# Altium PCB Driver3.0.PcbDoc
Units mm, origin at the board's own origin, x right, y up, seen from the top; angles counter-clockwise.
Board outline 90 x 60 mm, 2 copper layers (Top Layer, Bottom Layer); 33 components, 24 nets, 97 pads, 0 vias.
Unrouted connection lines stored in the file: 66.
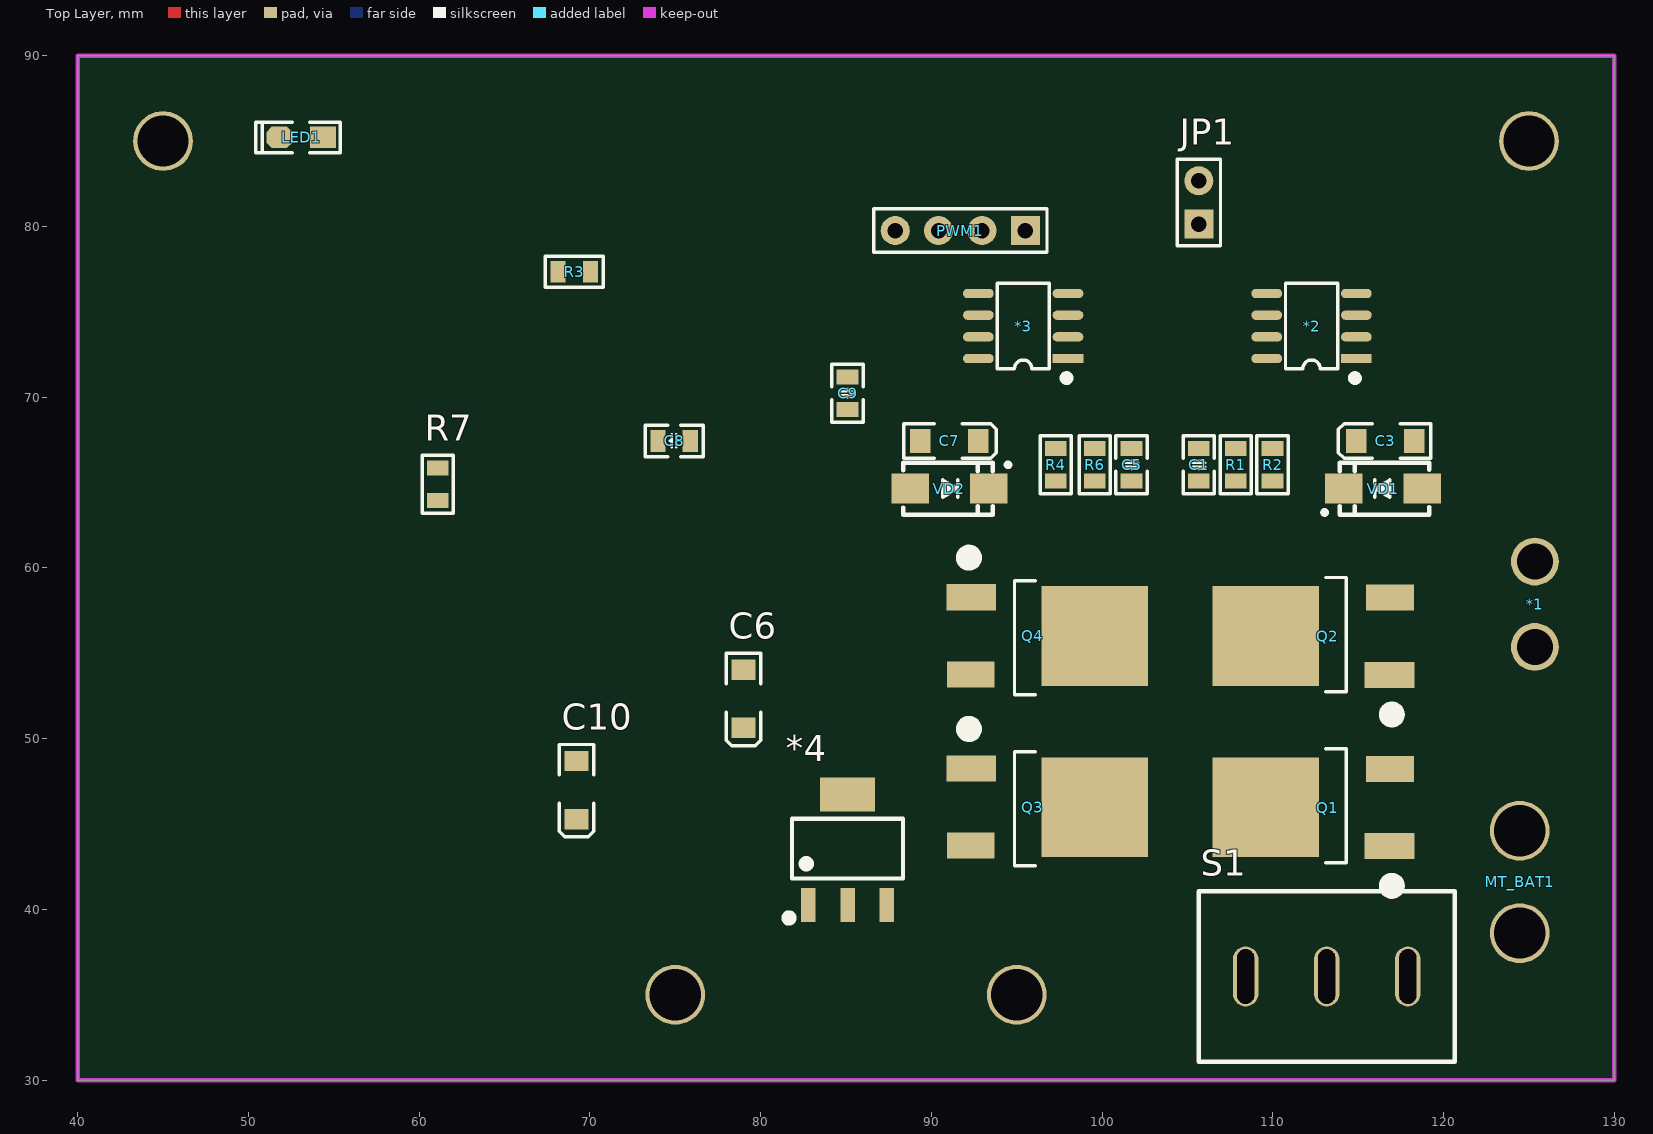
[diagram p0: Top Layer view]
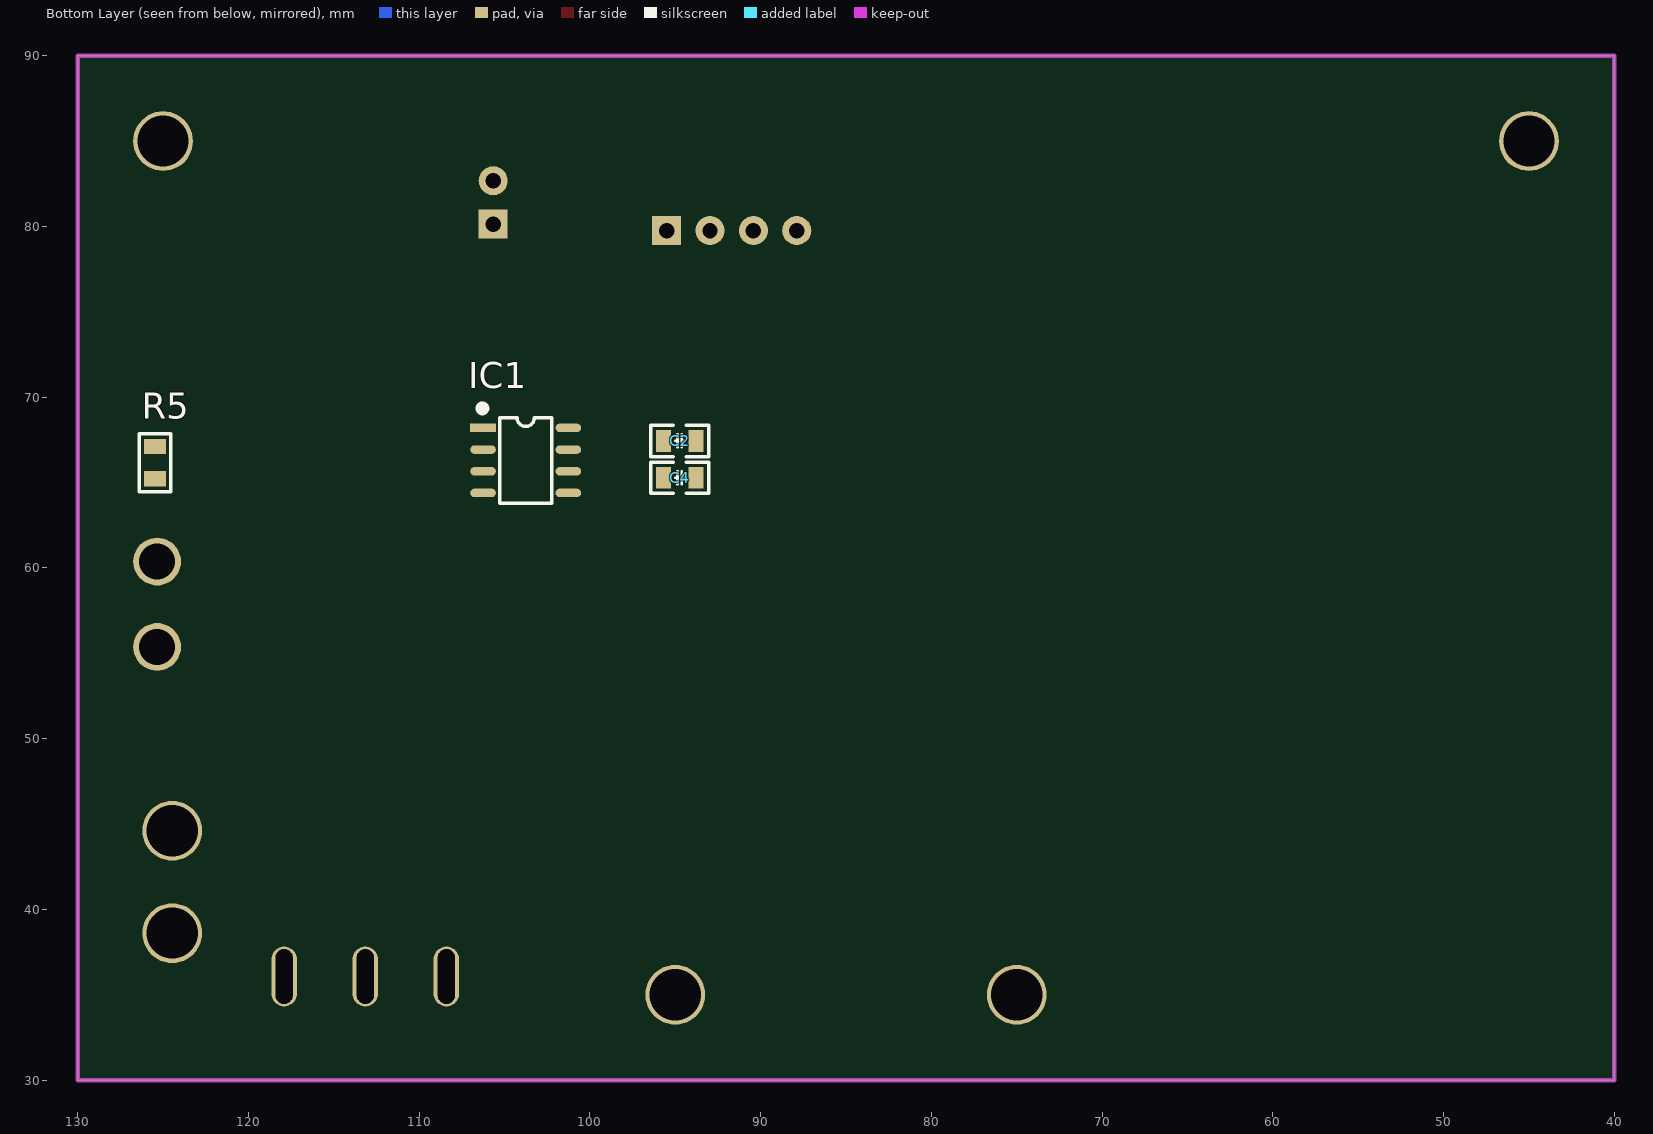
[diagram p1: Bottom Layer view, seen from below]

## Layer stack, top to bottom
Top Solder: solder mask 0.0102, Solder Resist, Dk 3.5
Top Layer: signal copper 0.0356
Dielectric 1: dielectric 0.32, FR-4, Dk 4.8
Bottom Layer: signal copper 0.0356
Bottom Solder: solder mask 0.0102, Solder Resist, Dk 3.5

## Board outline
40,30 130,30 130,90 40,90

## Design rules (kind name [scope] priority, off if disabled: settings)
Clearance [All] p1: gap=0.254
PolygonConnect [All] p1: connectstyle=Relief reliefconductorwidth=0.254 reliefentries=4 polygonreliefangle="90 Angle" airgapwidth=0.254
RoutingVias [All] p1: holewidth=0.381 width=0.508 viastyle="Through Hole" minholewidth=0.254 minwidth=0.254 maxholewidth=1.016 maxwidth=1.27
SolderMaskExpansion [All] p1: expansion=0.102
Width [All] p1: maxlimit=2.54 minlimit=0.254 preferedwidth=0.254 minimp=50.000000 maximp=50.000000 favimp=50.000000
30 further rules are at their usual default settings.

## Components (designator, comment, footprint, x,y, rotation, side; value= is the part's Value field where it differs from the comment)
*1 "Motor" HOLE 125.349,55.372 r90 top
*2 "IR2014S" SOP8_N 112.268,74.168 r180 top
*3 "IR2014S" SOP8_N 95.377,74.168 r180 top
*4 "LM2940" SOT223_N 85.09,43.561 r0 top
C1 "104" "C 0805_L" 105.664,66.04 r90 top
C2 "104" "C 0805_L" 94.742,67.437 r0 bottom
C3 "Cap Pol1" "CD A(3216)" 116.586,67.437 r0 top
C4 "103" "C 0805_L" 94.742,65.278 r0 bottom
C5 "104" "C 0805_L" 101.727,66.04 r90 top
C6 "Cap Pol1" "CD A(3216)" 78.994,52.324 r90 top
C7 "Cap Pol1" "CD A(3216)" 91.059,67.437 r180 top
C8 "104" "C 0805_L" 74.93,67.437 r0 top
C9 "104" "C 0805_L" 85.09,70.231 r90 top
C10 "Cap Pol1" "CD A(3216)" 69.215,46.99 r90 top
IC1 "ACS712" SOP8_L 103.759,66.294 r180 bottom
JP1 "HDR-1X2" HDR2.54-LI-2P 105.664,81.407 r90 top
LED1 "红色" "LED 0805B" 53.086,85.217 r180 top
MT_BAT1 "Header 2" POWER 124.46,38.608 r90 top
PWM1 "HDR-1X4" HDR2.54-LI-4P 91.694,79.756 r180 top
Q1 "44H11" TO252 113.792,45.974 r90 top
Q2 "44H11" TO252 113.792,56.007 r90 top
Q3 "44H11" TO252 95.377,45.974 r270 top
Q4 "44H11" TO252 95.377,56.007 r270 top
R1 "1K" "R 0805_L" 107.823,66.04 r270 top
R2 "1K" "R 0805_L" 109.982,66.04 r270 top
R3 "1K" "R 0805_L" 69.088,77.343 r180 top
R4 "1K" "R 0805_L" 97.282,66.04 r270 top
R5 "1K" "R 0805_L" 125.476,66.167 r270 bottom
R6 "1K" "R 0805_L" 99.568,66.04 r270 top
R7 "1K" "R 0805_L" 61.087,64.897 r270 top
S1 "KCD1-101" SW_P 113.157,36.068 r0 top
VD1 "SS14" SMA 116.459,64.643 r180 top
VD2 "SS14" SMA 91.059,64.643 r0 top

## Footprints (in the part's own frame and the unit in brackets; to place one, negate y for a bottom-side part, rotate by r counter-clockwise, add the part's x,y. Pads: shape width x height; smd on the part's side, far side on the other; paste and mask are expansions set on the pad)
"C 0805_L" [mil] "无极性贴片电容"
  rect 35x50 smd: 1(-37.4,0) 2(37.4,0)
  silkscreen extent -67,-36 67,36, body extent -39,-24 39,24, height 20
"CD A(3216)" [mm] "长3.2mm，宽1.6mm，厚1.6mm"
  rect 1.2x1.4 smd: 1(-1.7,0) 2(1.7,0)
  silkscreen extent -2.74,-1.02 2.67,1.02, body extent -1.6,-0.8 1.6,0.8, height 1.6
HDR2.54-LI-2P [mm] "排针，2脚"
  rect 1.7x1.7 hole 0.9: 1(-1.27,0)
  round 1.7 hole 0.9: 2(1.27,0)
  silkscreen extent -2.54,-1.27 2.54,1.27, body extent -2.54,-1.27 2.54,1.27, height 8.5
HDR2.54-LI-4P [mm] "排针，4脚"
  rect 1.7x1.7 hole 0.9: 1(-3.81,0)
  round 1.7 hole 0.9: 2(-1.27,0) 3(1.27,0) 4(3.81,0)
  silkscreen extent -5.08,-1.27 5.08,1.27, body extent -5.08,-1.27 5.08,1.27, height 8.5
HOLE [mm]
  round 2.8 hole 2.1: 1(0,0) 2(5,0)
"LED 0805B" [mil] "蓝色0805LED"
  rect 60x50 smd: 1(-50,0)
  oct 60x50 smd: 2(50,0)
  silkscreen extent -90,-35 105,35, body extent -39,-25 39,25, height 32
POWER [mm]
  round 3.5 hole 3: 1(0,0) 2(6,0)
"R 0805_L" [mil] "1/8W贴片电阻"
  rect 35x50 smd: 1(-37.4,0) 2(37.4,0)
  silkscreen extent -67,-36 67,36, body extent -39,-25 39,25, height 20
SMA [mm] "4.5x2.6*2.2mm（长宽高，不包括引脚）"
  rect 2.2x1.75 smd: 1(-2.3,0) 2(2.3,0)
  silkscreen extent -2.7,-1.52 3.56,1.52, body extent -2.53,-1.3 2.58,1.3, height 2.15
SOP8_L [mm] "5*6*1.8mm（长宽高）"
  rect 1.5x0.5 smd: 1(-2.5,1.905)
  oval 1.5x0.5 smd: 2(-2.5,0.635) 3(-2.5,-0.635) 4(-2.5,-1.905) 5(2.5,-1.905) 6(2.5,-0.635) 7(2.5,0.635) 8(2.5,1.905)
  silkscreen extent -2.69,-2.5 1.52,3.2, body extent -3,-2.5 3,2.5, height 1.9
SOP8_N [mm] "5*6*1.8mm（长宽高）"
  rect 1.8x0.55 smd: 1(-2.625,1.905)
  oval 1.8x0.55 smd: 2(-2.625,0.635) 3(-2.625,-0.635) 4(-2.625,-1.905) 5(2.625,-1.905) 6(2.625,-0.635) 7(2.625,0.635) 8(2.625,1.905)
  silkscreen extent -2.69,-2.5 1.52,3.2, body extent -3,-2.5 3,2.5, height 1.9
SOT223_N [mm] "6.4x7x1.6mm(长宽高)"
  rect 0.85x2 smd: 1(-2.3,-3.302) 2(0,-3.302) 3(2.3,-3.302)
  rect 3.2x2 smd: 2(0,3.175)
  silkscreen extent -3.63,-4.26 3.25,1.75, body extent -3.25,-3.51 3.25,3.51, height 1.65
SW_P [mm]
  oval 1.5x3.5 hole 1 slot 3.2 at 90 deg: 1(-4.75,0) 2(0,0) 3(4.75,0)
  silkscreen extent -7.5,-5 7.5,5
TO252 [mil] "252晶体管"
  rect 60x115 smd: 1(-89.55,-119.77)
  rect 230x245 smd: 2(0,165.35)
  rect 60x110 smd: 3(88.45,-120.77)
  silkscreen extent -196,-140 135,28, body extent -127,-120 129,251, height 91

## Part data
C1 C2 C4 C5 C8 C9: library part C, "无极性贴片电容"
C3 C6 C7 C10: "Polarized Capacitor (Radial)"
IC1: "电流检测芯片"
JP1: library part "Header 2", "2P接插件"
LED1: library part LED-SMD, "贴片LED"
MT_BAT1: "Header, 2-Pin"
PWM1: library part "Header 4", "4P接插件"
Q1 Q2 Q3 Q4: "互补功率-NPN型"
R1 R2 R3 R4 R5 R6 R7: library part R, "贴片电阻"
S1: "1路单刀船型开关"
VD1 VD2: "肖特基二极管"

## Free pads (board coordinates)
  round 3.5 hole 3: 0(45,85) 1(125,85) 2(75,35) 3(95,35)

## Nets (pads, with @x,y where several pads share a name; then routed paths per layer and width w, separated by ;. In a path a pad name is that pad's centre, name@x,y a point inside that pad or via, vN(x,y) a via of type N, cw(c..) or ccw(c..) an arc to the next point about the centre after c; other vN are vias at no path point)
5V: *4.3 C2.2 C9.1 IC1.8 R3.2
12V: *2.1 *2.3 *3.1 *3.3 C3.1 C7.1 PWM1.4 VD1.1 VD2.1
ADC_CRT_1: IC1.7 JP1.1
AGND: MT_BAT1.2 Q2.3 Q4.3 R5.2 R7.2
CRT_TEST_1: *1.2 IC1.1 IC1.2
DGND: *2.4 *3.4 *4.2 C2.1 C3.2 C4.1 C6.2 C7.2 C8.2 C9.2 IC1.5 JP1.2 LED1.2 PWM1.1 R5.1 R7.1
MOTOR1_IN1: *2.2 PWM1.2
MOTOR1_IN2: *3.2 PWM1.3
MOTOR1_N: *3.6 C5.2 IC1.3 IC1.4 Q3.3 Q4.2
MOTOR1_P: *1.1 *2.6 C1.2 Q1.3 Q2.2
Net*2_5: *2.5 R2.1
Net*2_7: *2.7 R1.1
Net*2_8: *2.8 C1.1 VD1.2
Net*3_5: *3.5 R6.1
Net*3_7: *3.7 R4.1
Net*3_8: *3.8 C5.1 VD2.2
NetC4_2: C4.2 IC1.6
NetLED1_1: LED1.1 R3.1
NetMT_BAT1_1: MT_BAT1.1 S1.2
NetQ1_1: Q1.1 R1.2
NetQ2_1: Q2.1 R2.2
NetQ3_1: Q3.1 R4.2
NetQ4_1: Q4.1 R6.2
VBAT: *4.1 C6.1 C8.1 Q1.2 Q3.2 S1.1
pads on no net: C10.1 C10.2 S1.3

## Keep-outs
Keep-Out Layer:
  the board outline again, w0.254